# Altium PCB CH569W-R0.PcbDoc (part 1 of 4)
Units mil, origin at the board's own origin, x right, y up, seen from the top; angles counter-clockwise.
Board outline 3674 x 3156.46 mil, 4 copper layers (Top Layer, Mid-Layer 1, Mid-Layer 2, Bottom Layer); 78 components, 99 nets, 392 pads, 683 vias.
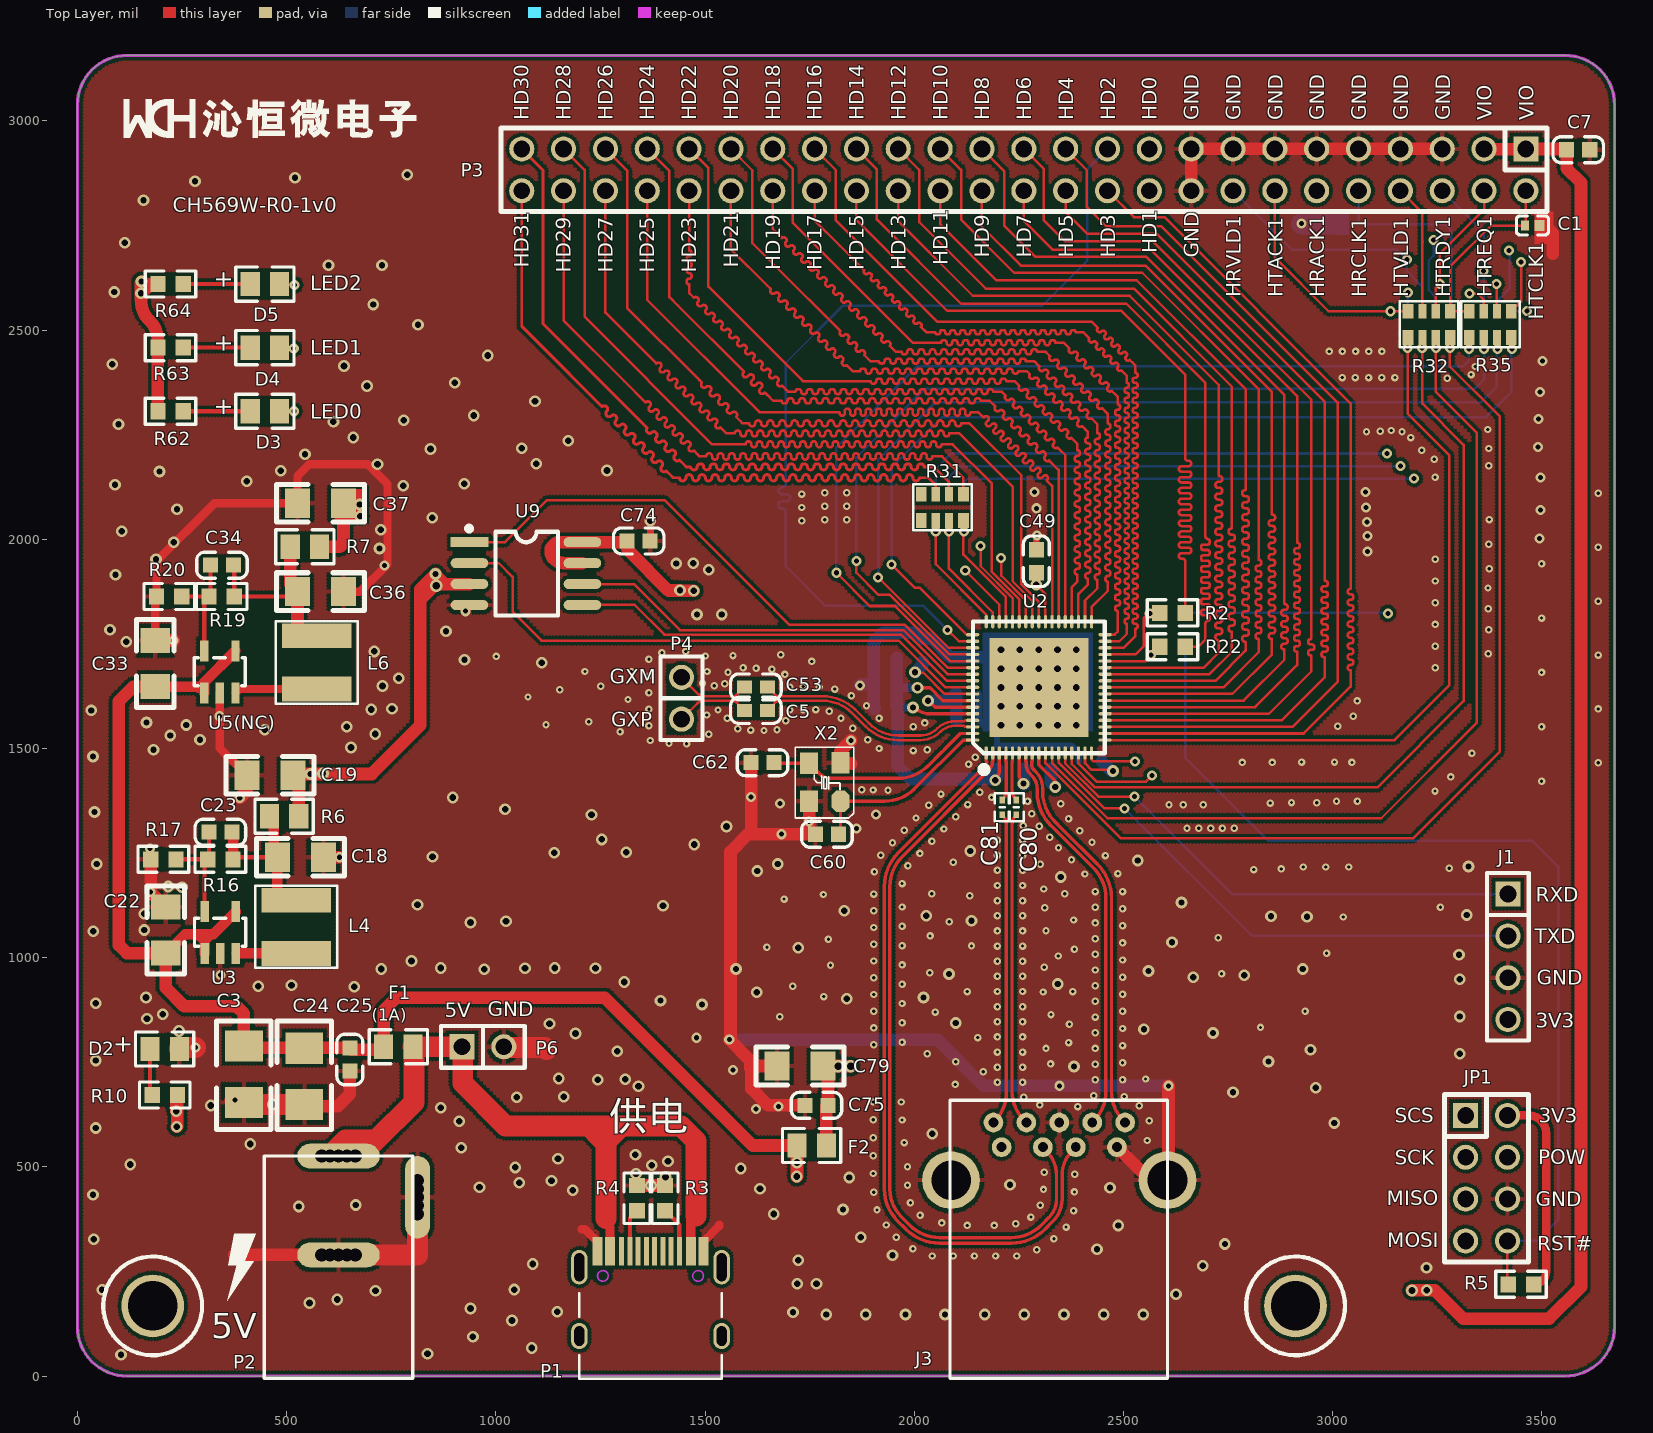
[diagram p0: Top Layer view]
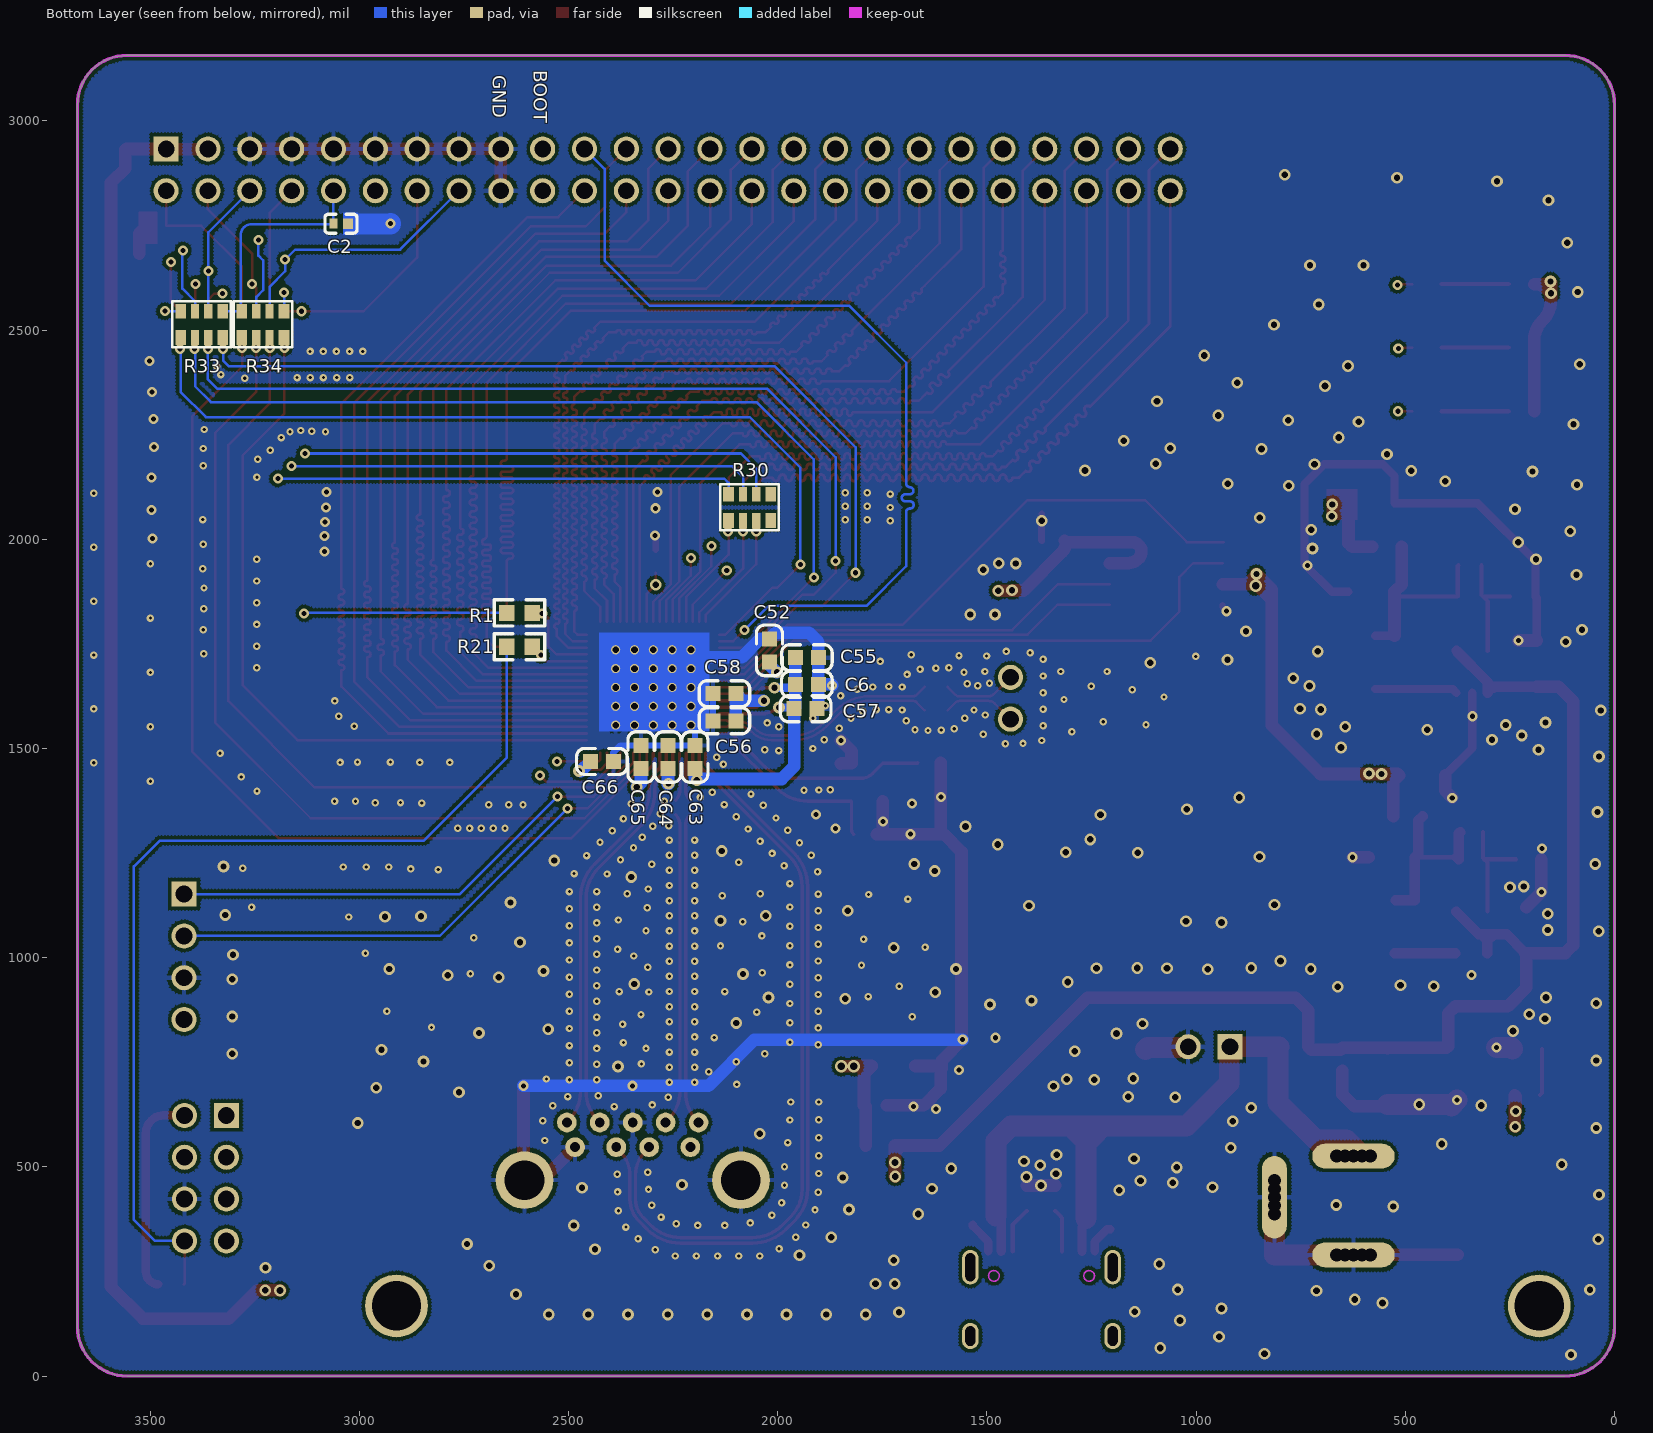
[diagram p1: Bottom Layer view, seen from below]
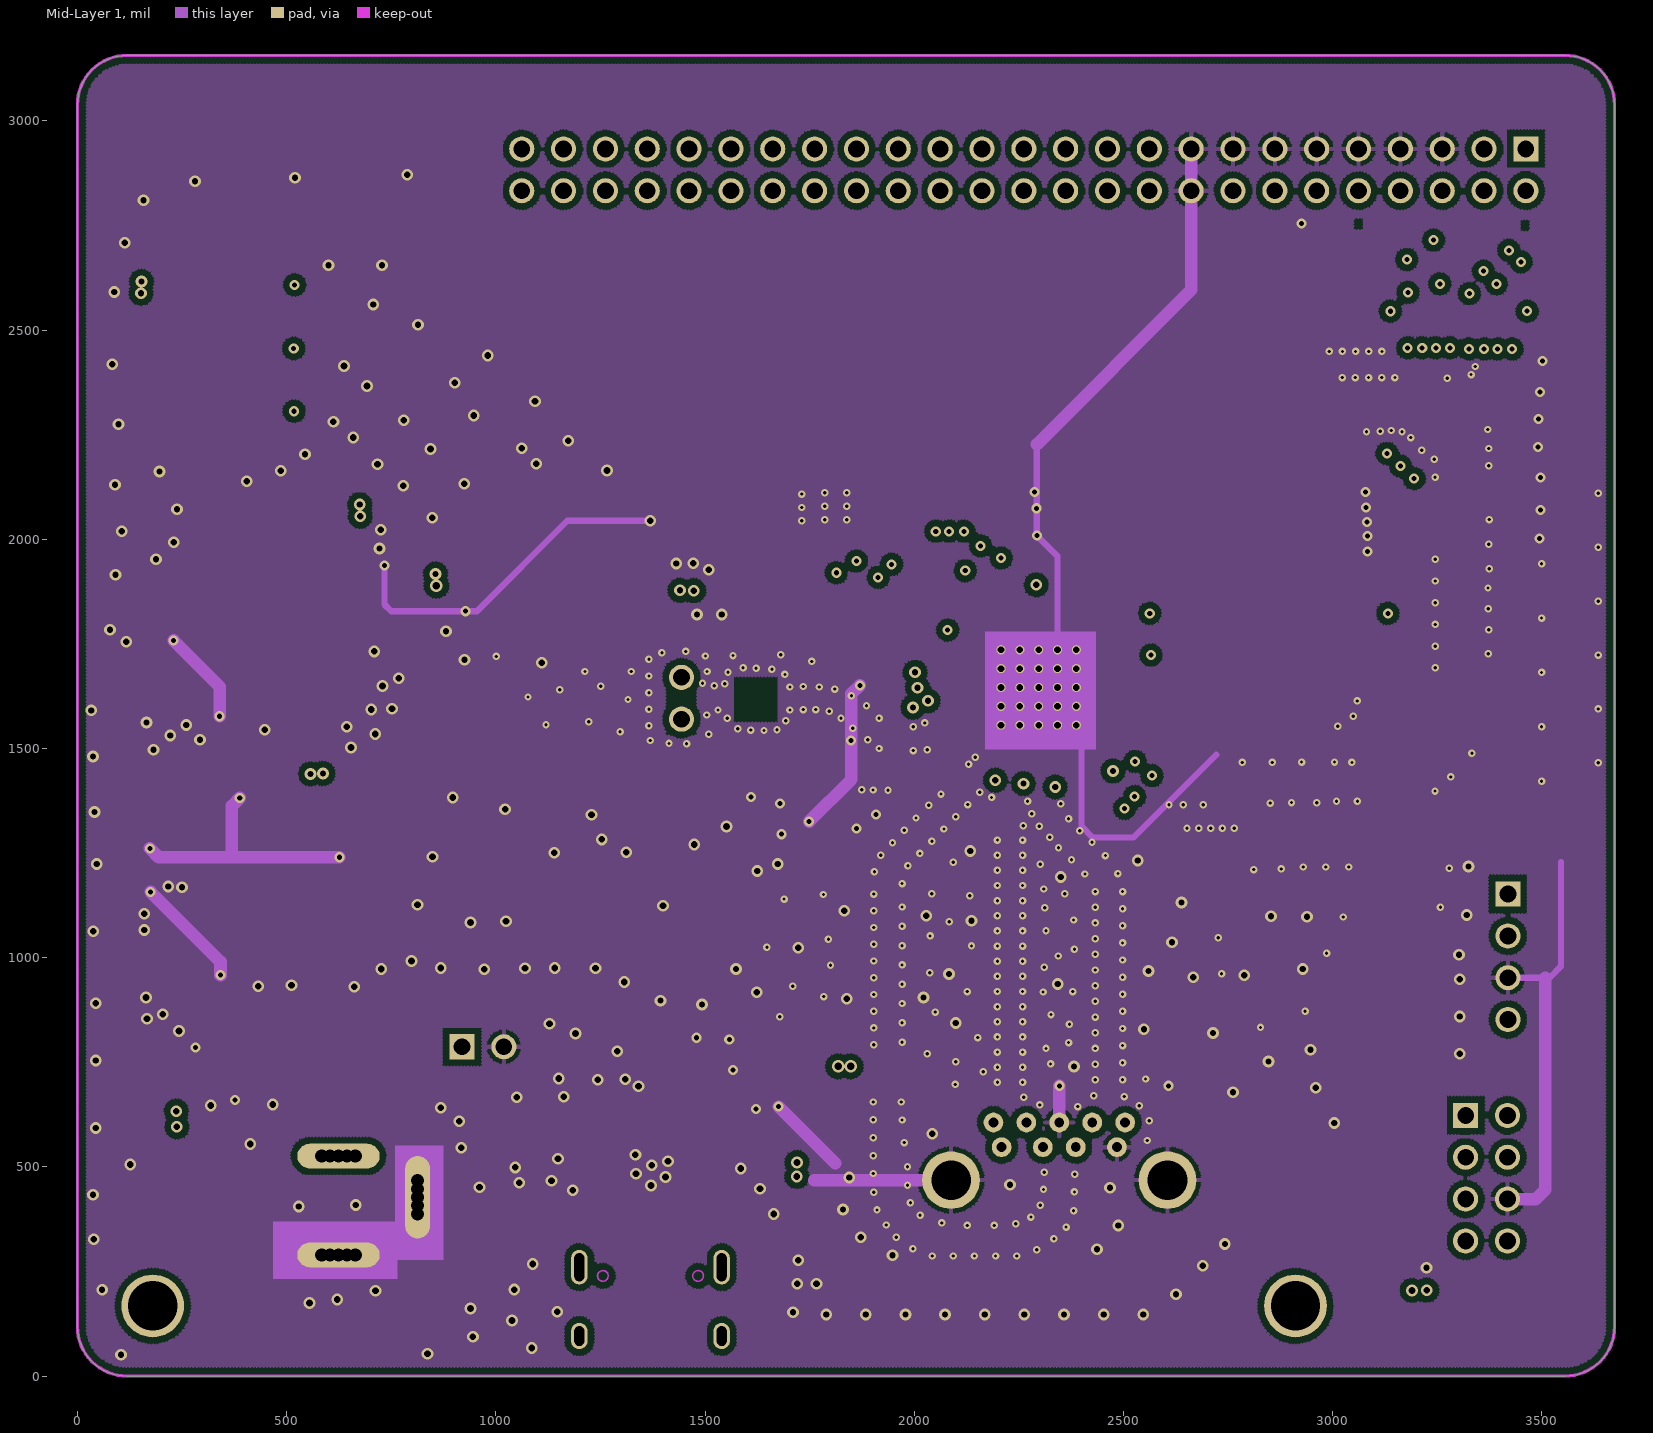
[diagram p2: Mid-Layer 1]
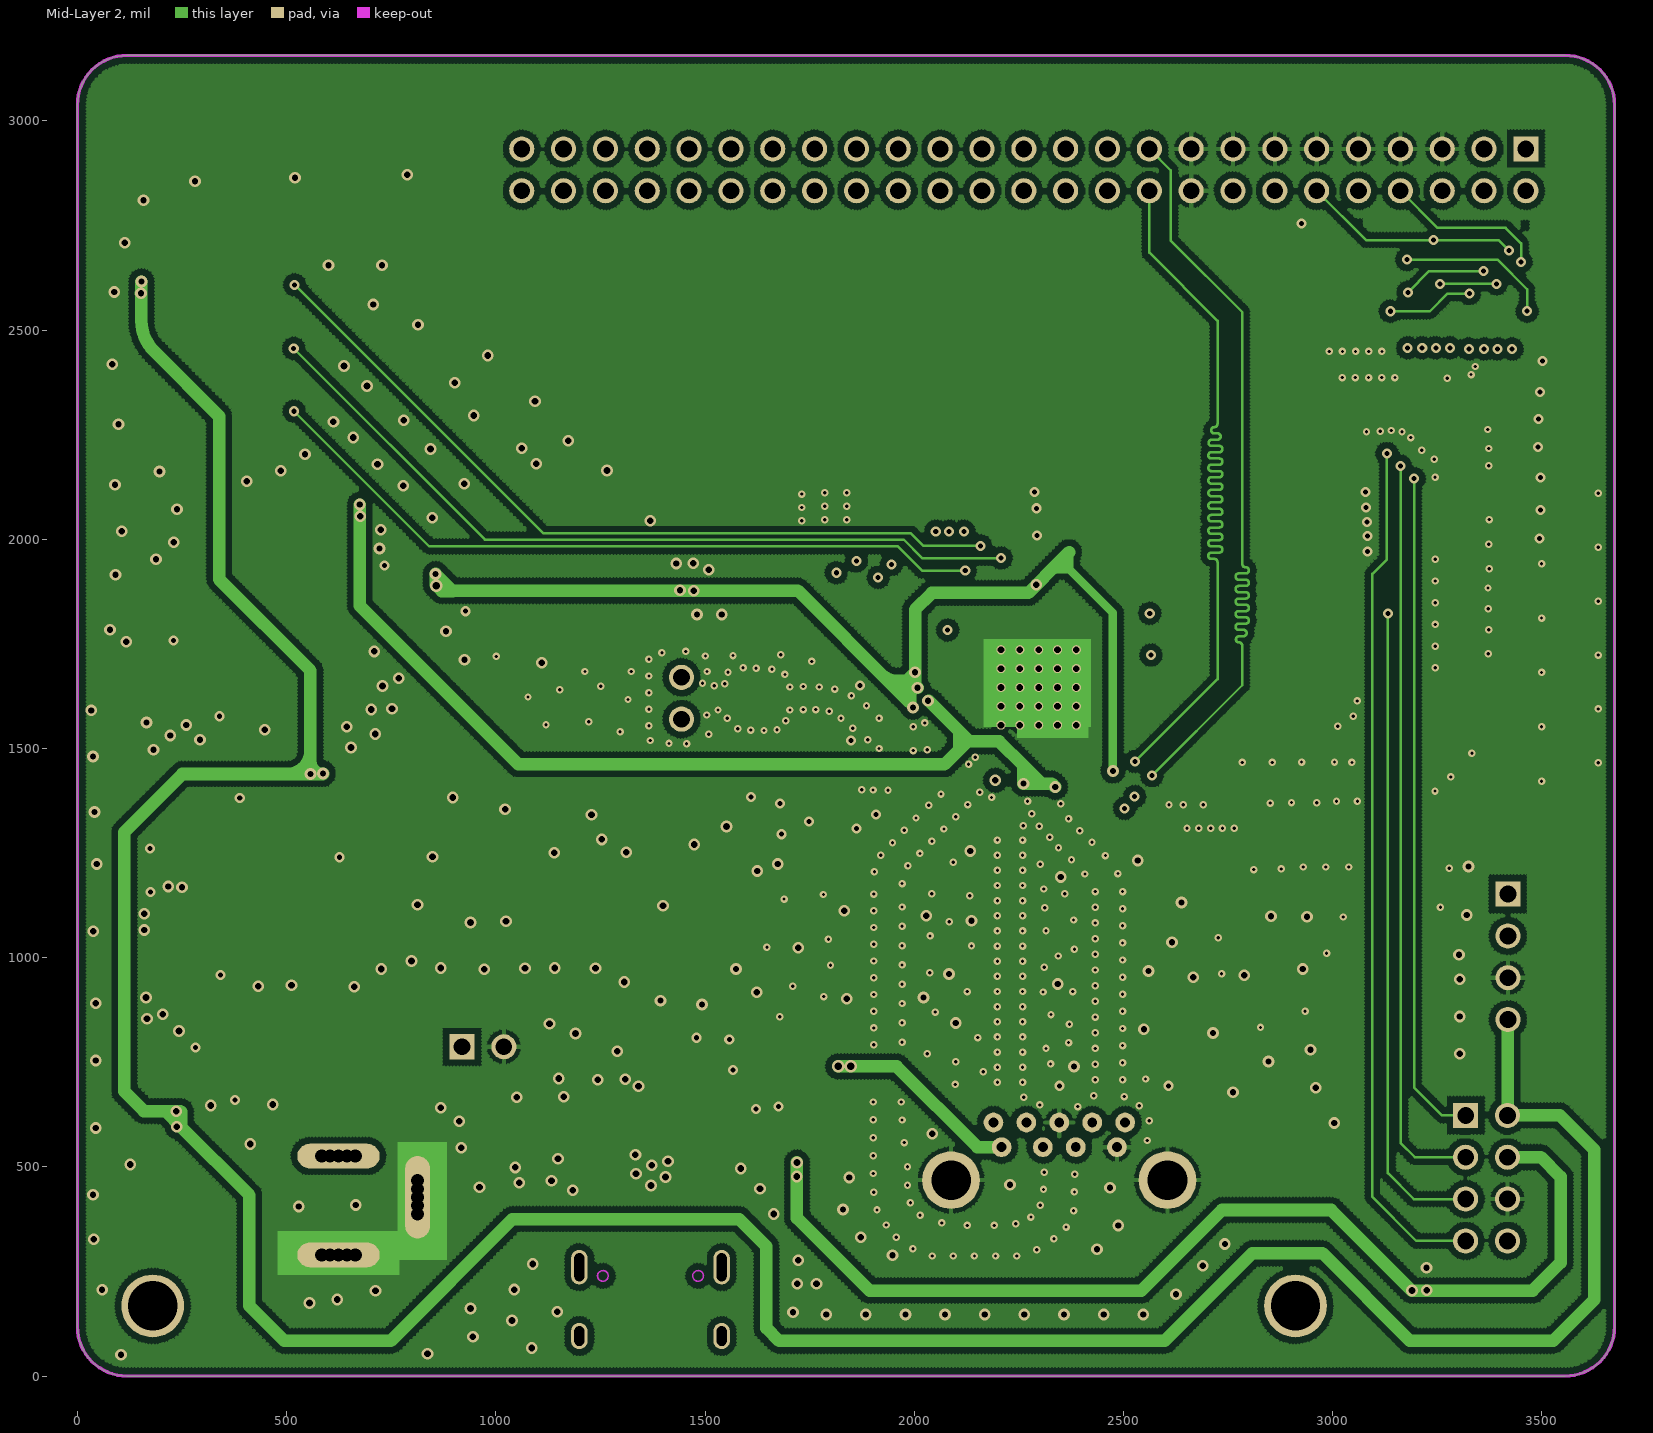
[diagram p3: Mid-Layer 2]

## Layer stack, top to bottom
Top Solder: solder mask 0.4, Solder Resist, Dk 3.5
Top Layer: signal copper 1.4
Dielectric1: core 12.6, FR-4, Dk 4.8
Mid-Layer 1: signal copper 1.4
Dielectric2: prepreg 12.6, FR-4, Dk 4.8
Mid-Layer 2: signal copper 1.4
Dielectric3: core 12.6, FR-4, Dk 4.8
Bottom Layer: signal copper 1.4
Bottom Solder: solder mask 0.4, Solder Resist, Dk 3.5

## Board outline
0,118.11 ccw(c118.11,118.11) 118.11,0 3555.89,0 ccw(c3555.89,118.11) 3674,118.11 3674,3038.35 ccw(c3555.89,3038.35) 3555.89,3156.46 118.11,3156.46 ccw(c118.11,3038.35) 0,3038.35

## Design rules (kind name [scope] priority, off if disabled: settings)
Clearance Clearance_4 [OnLayer('Bottom Layer') and InPolygon] p1: gap=8 ignorepadtopadclearanceinfootprint=FALSE except(0: Arc-Hole Track-Hole SMDPad-Hole THPad-Hole Via-Hole Fill-Hole Poly-Hole Region-Hole Text-Hole)
Clearance Clearance_2 [OnLayer('Top Layer')and InPolygon] p2: gap=8 ignorepadtopadclearanceinfootprint=FALSE except(0: Arc-Hole Track-Hole SMDPad-Hole THPad-Hole Via-Hole Fill-Hole Poly-Hole Region-Hole Text-Hole)
Clearance Clearance_3 [InPolygon] p3: gap=15 ignorepadtopadclearanceinfootprint=FALSE except(0: Arc-Hole Track-Hole SMDPad-Hole THPad-Hole Via-Hole Fill-Hole Poly-Hole Region-Hole Text-Hole)
Clearance Clearance_1 [IsVia] p4: gap=5 ignorepadtopadclearanceinfootprint=FALSE except(0: Arc-Hole Track-Hole SMDPad-Hole THPad-Hole Via-Hole Fill-Hole Poly-Hole Region-Hole Text-Hole)
Clearance [All] p5: gap=3.5 ignorepadtopadclearanceinfootprint=FALSE except(0: Arc-Hole Track-Hole SMDPad-Hole THPad-Hole Via-Hole Fill-Hole Poly-Hole Region-Hole Text-Hole)
ComponentClearance [All] p1 off: gap=10 collisioncheckmode=3 verticalgap=10 showdistances=FALSE
DiffPairsRouting [All] p1: maxlimit=5 minlimit=5 mostfreqgap=5 toplayer_minwidth=15 toplayer_maxwidth=15 toplayer_prefwidth=15 midlayer1_minwidth=15 midlayer1_maxwidth=15 midlayer1_prefwidth=15 midlayer2_minwidth=15 midlayer2_maxwidth=15 midlayer2_prefwidth=15 bottomlayer_minwidth=15 bottomlayer_maxwidth=15 bottomlayer_prefwidth=15 maxuncoupledlength=500
MinimumSolderMaskSliver [All] p1 off: minsoldermaskwidth=10
PolygonConnect PolygonConnect_1 [IsVia] p1: connectstyle=Direct reliefconductorwidth=10 reliefentries=4 polygonreliefangle="90 Angle" airgapwidth=10
PolygonConnect [All] p2: connectstyle=Relief reliefconductorwidth=10 reliefentries=4 polygonreliefangle="90 Angle" airgapwidth=10
RoutingVias [All] p1: holewidth=28 width=50 viastyle="Through Hole" minholewidth=7.87 minwidth=17.72 maxholewidth=28 maxwidth=50
SilkToSilkClearance [All] p1 off: silktosilkclearance=10
SilkToSolderMaskClearance SilkscreenOverComponentPads [IsPad] p1 off: minsilkscreentomaskgap=10 clearancetoexposedcopper=TRUE
SolderMaskExpansion [All] p1: expansion=4 istentingtop=FALSE
Width [All] p1: maxlimit=80 minlimit=3.5 preferedwidth=10
25 further rules are at their usual default settings.

## Classes and differential pairs
differential pair SSRX: +SSRX_P -SSRX_N
differential pair SSTX: +SSTX_P -SSTX_N
differential pair UD: +UD_P -UD_N

## Components (designator, comment, footprint, x,y, rotation, side; value= is the part's Value field where it differs from the comment)
C1 "NC(20pF)" 0402C 3494.64,2750.08 r270 top
C2 "NC(20pF)" 0402C 3027.36,2754.38 r270 bottom
C3 "NC(33uF)" 3528 397.96,653.89 r270 top
C5 "100nF" 0603C#1 1649,1591 r180 top
C6 "100nF" 0603C#2 1957.98,1653 r180 bottom
C7 "100nF" 0603C#2 3559.59,2930.96 r0 top
C18 "10uF" 3216 588,1240 r0 top
C19 "100nF" 3216 405,1436 r180 top
C22 "10uF" 3216 211,1121 r90 top
C23 "20pF" 0603C#2 314.19,1300 r0 top
C24 "33uF" 3528 542.48,783.89 r90 top
C25 "100nF" 0603C#2 651.11,729.18 r90 top
C33 "NC(10uF)" 3216 186,1758 r90 top
C34 "NC(20pF)" 0603C#2 318,1938 r0 top
C36 "NC(10uF)" 3216 636,1875 r0 top
C37 "NC(100nF)" 3216 526,2086 r180 top
C49 "100nF" 0603C#2 2292,1920 r90 top
C52 "100nF" 0603C#2 2020,1762 r270 bottom
C53 "100nF" 0603C#1 1649,1647.08 r180 top
C55 "3.3uF" 0603C#2 1903,1717 r0 bottom
C56 "100nF" 0603C#2 2155,1566 r180 bottom
C57 "100nF" 0603C#2 1906,1595 r0 bottom
C58 "3.3uF" 0603C#2 2155,1631 r180 bottom
C60 "20pF" 0603C#2 1764,1295 r0 top
C62 "20pF" 0603C#2 1665,1466 r180 top
C63 "100nF" 0603C#2 2198,1507 r270 bottom
C64 "100nF" 0603C#2 2262.5,1507 r270 bottom
C65 "100nF" 0603C#2 2327,1507 r270 bottom
C66 "100nF" 0603C#2 2393,1469 r0 bottom
C74 "100nF" 0603C#2 1369,1996 r180 top
C75 "100nF" 0603C#2 1794,647 r180 top
C79 "10uF" 3216 1782,741 r0 top
C80 "100nF" "C 0402_L" 2243.9,1359.03 r270 top
C81 "100nF" "C 0402_L" 2210.4,1359.03 r270 top
D2 "LED1" 0805+ 173.47,781.57 r0 top
D3 "翠绿" 0805+ 413,2306 r0 top
D4 "蓝灯" 0805+ 413,2458 r0 top
D5 "黄灯" 0805+ 413,2610 r0 top
F1 "1A" 0805 802.05,786.97 r180 top
F2 "1A" 0805 1790,551 r180 top
J1 "CON4" SIP4-2.54mm 3419,1152 r0 top
J3 "USB-AF3.0" USB3.0-Receptacle 2209,547 r0 top
JP1 "HEADER 4X2" IDC8-2.54mm 3318,623 r0 top
L4 "3.3uH" SMD_5x5mm 523,1010 r90 top
L6 "NC(3.3uH)" SMD_5x5mm 572,1642 r90 top
P1 "TYPE-C-Receptacle-2.0" TYPE-C-Receptacle-2.0 1369.68,-6.74 r0 top
P2 "POWER_JACK" DC-005 624,525.76 r90 top
P3 "LEFT_P" IDC50-2.54mm 3462,2933 r180 top
P4 "HEADER 2" SIP2-2.54mm#1 1444,1670 r0 top
P6 "Header 2" SIP2-2.54mm#2 919.2,786.97 r90 top
R1 "0Ω" 0603 2587,1824 r0 bottom
R2 "0Ω" 0603 2587,1824 r0 top
R3 "NC(5.1K)" 0603 1404.55,394.77 r90 top
R4 "NC(5.1K)" 0603 1337.34,394.77 r90 top
R5 "10K" 0603 3419.95,219.14 r0 top
R6 "0Ω" 0805 459,1338 r0 top
R7 "NC(0Ω)" 0805 508.58,1982 r0 top
R10 "1K" 0603 178.47,671.57 r0 top
R16 "10K" 0603 372,1235 r180 top
R17 "2.2K" 0603 175,1235 r0 top
R19 "NC(10K)" 0603 375,1863 r180 top
R20 "NC(10K)" 0603 189,1863 r0 top
R21 "0Ω" 0603 2587,1743 r0 bottom
R22 "0Ω" 0603 2587,1743 r0 top
R30 "0Ω" RCA-8P4R-0603 2067.25,2076 r180 bottom
R31 "0Ω" RCA-8P4R-0603 2067.25,2076 r180 top
R32 "0Ω" RCA-8P4R-0603 3230.61,2513.5 r180 top
R33 "0Ω" RCA-8P4R-0603 3376.94,2513.5 r0 bottom
R34 "0Ω" RCA-8P4R-0603 3230.61,2513.5 r180 bottom
R35 "0Ω" RCA-8P4R-0603 3376.94,2513.5 r0 top
R62 "1K" 0603 253,2306 r180 top
R63 "1K" 0603 253,2458 r180 top
R64 "1K" 0603 253,2610 r180 top
U2 "CH569W" QFN68_8X8 2298,1646 r0 top locked
U3 "8502AM" SOT753 304,1010 r0 top
U5(NC) "8502AM" SOT753 303,1633 r0 top
U9 "W25Q32JV" SOIC-8_208mil 937,1993 r0 top
X2 "30MHz" 3225 1749,1374 r90 top

## Footprints (in the part's own frame and the unit in brackets; to place one, negate y for a bottom-side part, rotate by r counter-clockwise, add the part's x,y. Pads: shape width x height; smd on the part's side, far side on the other; paste and mask are expansions set on the pad)
0402C [mm]
  rect 0.65x0.6 smd mask+0.051: 1(0,0)
  rect 0.618x0.508 smd mask+0.051: 2(0,-0.88)
  silkscreen extent -0.58,-1.4 0.57,0.55
0603 [mm]
  rect 0.93x0.98 smd: 1(0,0) 2(1.54,0)
  silkscreen extent -0.76,-0.79 2.3,0.79
0603C#1 [mil]
  rect 36x31.08 smd: 1(0,0) 2(55,0)
  silkscreen extent -33,-31 88,31
0603C#2 [mil]
  rect 36x36 smd: 1(0,0) 2(55,0)
  silkscreen extent -33,-31 88,31
0805 [mm]
  rect 1.16x1.47 smd: 1(0,0) 2(1.78,0)
  silkscreen extent -0.88,-1.04 2.66,1.03
0805+ [mm]
  rect 1.16x1.47 smd: 1(0,0) 2(1.78,0)
  silkscreen extent -0.88,-1.04 2.66,1.03
3216 [mil]
  rect 60x70 smd: 1(0,0) 2(-110,0)
  silkscreen extent -160,-45 50,45
3225 [mm]
  oct 1.3x1.1 smd: 1(0,-1.9)
  rect 1.3x1.1 smd: 2(2.337,-1.9) 3(2.3,0) 4(0,0)
  silkscreen extent -1.02,-2.7 3.27,0.84
3528 [mil]
  rect 75x90 smd: 1(0,0) 2(-135,0)
  silkscreen extent -195,-65 65,65
"C 0402_L" [mm]
  rect 0.4x0.343 smd: 1(-0.45,0) 2(0.45,0)
  silkscreen extent -0.85,-0.45 0.85,0.45, body extent -0.5,-0.26 0.5,0.26, height 0.53
DC-005 [mm]
  round 1 hole 0.8: 1(0,1.016) 1(0,0.508) 1(0,-0.508) 1(0,-1.016) 2(-6,-1.016) 2(-6,-0.508) 2(-6,0.508) 2(-6,1.016) 3(-3.516,-4.8) 3(-3.008,-4.8) 3(-1.992,-4.8) 3(-1.484,-4.8)
  oval 1.5x5 hole 0.8: 1(0,0) 2(-6,0)
  oval 5x1.5 hole 0.8: 3(-2.5,-4.8)
  silkscreen extent -13.5,-4.5 0,4.5
IDC8-2.54mm [mil]
  rect 60x60 hole 40: 1(0,0)
  round 60 hole 40: 2(100,0) 3(0,-100) 4(100,-100) 5(0,-200) 6(100,-200) 7(0,-300) 8(100,-300)
  silkscreen extent -50,-350 150,50
IDC50-2.54mm [mil]
  rect 60x60 hole 40: 1(0,0)
  round 60 hole 40: 2(0,100) 3(100,0) 4(100,100) 5(200,0) 6(200,100) 7(300,0) 8(300,100) 9(400,0) 10(400,100) 11(500,0) 12(500,100) 13(600,0) 14(600,100) 15(700,0) 16(700,100) 17(800,0) 18(800,100) 19(900,0) 20(900,100) 21(1000,0) 22(1000,100) 23(1100,0) 24(1100,100) 25(1200,0) 26(1200,100) 27(1300,0) 28(1300,100) 29(1400,0) 30(1400,100) 31(1500,0) 32(1500,100) 33(1600,0) 34(1600,100) 35(1700,0) 36(1700,100) 37(1800,0) 38(1800,100) 39(1900,0) 40(1900,100) 41(2000,0) 42(2000,100) 43(2100,0) 44(2100,100) 45(2200,0) 46(2200,100) 47(2300,0) 48(2300,100) 49(2400,0) 50(2400,100)
  silkscreen extent -50,-50 2450,150
QFN68_8X8 [mm]
  round 0.559 hole 0.406: 0(-2.299,-2.293) 0(-2.299,-1.149) 0(-2.299,-0.006) 0(-2.299,1.138) 0(-2.299,2.281) 0(-1.155,-2.293) 0(-1.155,-1.149) 0(-1.155,-0.006) 0(-1.155,1.138) 0(-1.155,2.281) 0(-0.012,-2.293) 0(-0.012,-1.149) 0(-0.012,-0.006) 0(-0.012,1.138) 0(-0.012,2.281) 0(1.132,-2.293) 0(1.132,-1.149) 0(1.132,-0.006) 0(1.132,1.138) 0(1.132,2.281) 0(2.275,-2.293) 0(2.275,-1.149) 0(2.275,-0.006) 0(2.275,1.138) 0(2.275,2.281)
  rect 6x6 smd: 0(0,0)
  oval 0.2x0.8 smd: 1(-3.2,-3.982) 2(-2.8,-3.982) 3(-2.4,-3.982) 4(-2,-3.982) 5(-1.6,-3.982) 6(-1.2,-3.982) 7(-0.8,-3.982) 8(-0.4,-3.982) 9(0,-3.982) 10(0.4,-3.982) 11(0.8,-3.982) 12(1.2,-3.982) 13(1.6,-3.982) 14(2,-3.982) 15(2.4,-3.982) 16(2.8,-3.982) 17(3.2,-3.982) 35(3.2,3.982) 36(2.8,3.982) 37(2.4,3.982) 38(2,3.982) 39(1.6,3.982) 40(1.2,3.982) 41(0.8,3.982) 42(0.4,3.982) 43(0,3.982) 44(-0.4,3.982) 45(-0.8,3.982) 46(-1.2,3.982) 47(-1.6,3.982) 48(-2,3.982) 49(-2.4,3.982) 50(-2.8,3.982) 51(-3.2,3.982)
  oval 0.8x0.2 smd: 18(4.018,-3.2) 19(4.018,-2.8) 20(4.018,-2.4) 21(4.018,-2) 22(4.018,-1.6) 23(4.018,-1.2) 24(4.018,-0.8) 25(4.018,-0.4) 26(4.018,0) 27(4.018,0.4) 28(4.018,0.8) 29(4.018,1.2) 30(4.018,1.6) 31(4.018,2) 32(4.018,2.4) 33(4.018,2.8) 34(4.018,3.2) 52(-4.018,3.2) 53(-4.018,2.8) 54(-4.018,2.4) 55(-4.018,2) 56(-4.018,1.6) 57(-4.018,1.2) 58(-4.018,0.8) 59(-4.018,0.4) 60(-4.018,0) 61(-4.018,-0.4) 62(-4.018,-0.8) 63(-4.018,-1.2) 64(-4.018,-1.6) 65(-4.018,-2) 66(-4.018,-2.4) 67(-4.018,-2.8) 68(-4.018,-3.2)
  silkscreen extent -4,-5.19 4,4
RCA-8P4R-0603 [mm]
  rect 0.65x0.9 smd: 1(-1.28,-0.8) 4(1.28,-0.8) 5(1.28,0.8) 8(-1.28,0.8)
  rect 0.5x0.9 smd: 2(-0.4,-0.8) 3(0.4,-0.8) 6(0.4,0.8) 7(-0.4,0.8)
  silkscreen extent -1.78,-1.4 1.78,1.4, body extent -1.6,-0.8 1.6,0.8, height 0.6
SIP2-2.54mm#1 [mil]
  round 60 hole 40: 1(0,0) 2(0,-100)
  silkscreen extent -50,-150 50,50
SIP2-2.54mm#2 [mil]
  rect 60x60 hole 40: 1(0,0)
  round 60 hole 40: 2(0,-100)
  silkscreen extent -50,-150 50,50
SIP4-2.54mm [mil]
  rect 60x60 hole 40: 1(0,0)
  round 60 hole 40: 2(0,-100) 3(0,-200) 4(0,-300)
  silkscreen extent -50,-350 50,50
SMD_5x5mm [mm]
  rect 1.5x4.2 smd: 1(0,0) 2(3.23,0)
  silkscreen extent -0.88,-2.5 4.12,2.5
SOIC-8_208mil [mil]
  rect 90x24 smd: 1(0,0)
  oval 90x24 smd: 2(0,-50) 3(0,-100) 4(0,-150) 5(270,-150) 6(270,-100) 7(270,-50) 8(270,0)
  silkscreen extent -7,-175 212,38
SOT753 [mil]
  rect 20x50 smd: 1(0,0) 2(37.4,0) 3(74.8,0) 4(74.8,100) 5(0,100)
  silkscreen extent -24,17 98,84
TYPE-C-Receptacle-2.0 [mm]
  oval 1x1.6 hole 0.6 slot 1.2 at 90 deg: 0(-4.32,2.6) 0(4.32,2.6)
  oval 1x2.1 hole 0.6 slot 1.7 at 90 deg: 0(-4.32,6.78) 0(4.32,6.78)
  rect 0.6x1.75 smd: A1(-3.225,7.75) A4(-2.45,7.75) B1(3.225,7.75) B4(2.45,7.75)
  rect 0.3x1.75 smd: A5(-1.25,7.75) A6(-0.25,7.75) A7(0.25,7.75) A8(1.25,7.75) B5(1.75,7.75) B6(0.75,7.75) B7(-0.75,7.75) B8(-1.75,7.75)
  Keep-Out Layer circle w0.1: c-2.89,6.25 r0.325
  Keep-Out Layer circle w0.1: c2.89,6.25 r0.325
  silkscreen extent -4.32,0 4.32,5.2
USB3.0-Receptacle [mm]
  round 3.5 hole 2.4: 0(-3.07,-2) 0(10.07,-2)
  round 1.2 hole 0.6: 1(0,0) 2(2.5,0) 3(4.5,0) 4(7,0) 5(7.5,1.5) 6(5.5,1.5) 7(3.5,1.5) 8(1.5,1.5) 9(-0.5,1.5)
  silkscreen extent -3.14,-14.04 10.07,2.85

## Part data
C1 C2 C3 C5 C6 C7 C18 C19 C22 C23 C24 C25 C33 C34 C36 C37 C49 C52 C53 C55 C56 C57 C58 C60 C62 C63 C64 C65 C66 C74 C75 C79 C80 C81: library part CAP, "Capacitor"
D2: "Typical RED GaAs LED", LatestRevisionDate=08-Jul-2005, LatestRevisionNote="Mech Layer 1 removed.", PackageDescription="LED; 2 Leads", PackageReference=LED-1, Published=8-Jun-2000, Publisher="Altium Limited"
D3: library part "0805 翠绿", "发光二极管", Package=0805, SuppliersPartNumber=C2297, ComponentLink1Description=供应商链接, ComponentLink1URL=http://www.szlcsc.com/product/details_2670.html, Supplier=LC
D4: library part "0805 蓝灯", "发光二极管", Package=0805, SuppliersPartNumber=C2293, ComponentLink1Description=供应商链接, ComponentLink1URL=http://www.szlcsc.com/product/details_2666.html, Supplier=LC
D5: library part "0805 黄灯", "发光二极管", Package=0805, SuppliersPartNumber=C2296, ComponentLink1Description=供应商链接, ComponentLink1URL=http://www.szlcsc.com/product/details_2669.html, Supplier=LC
F1 F2: library part FUSE1, "Fuse"
J1: "Connector"
J3: library part USB-AF3.0-90卷
L4 L6: library part INDUCTOR
P1: "Type-C USB2.0 母座"
P3: library part "HEADER 25X2"
P4 P6: "Header, 2-Pin"
  P6: LatestRevisionDate=17-Jul-2002, LatestRevisionNote="Re-released for DXP Platform.", Publisher="Altium Limited"
R1 R2 R3 R4 R5 R10 R16 R17 R19 R20 R21 R22 R62 R63 R64: library part R
R6 R7: library part RES
R30 R31 R32 R33 R34 R35: library part R-8P4R, "贴片网络排阻", BOM名称=贴片网络排阻, 学习资源=www.ooocke.com, 版权归属=源创客
U2: "32bit RISC-V MCU with USB 3.0 SS/HS & quad UART & AES & ETH & PIF"
X2: library part 晶体

## Free pads (board coordinates)
  round 150 hole 118.11: 0(179.91,167.63) 0(2911.43,167.63)

## Via types
v1: diameter 17.72, hole 7.87, Top Layer to Bottom Layer, tented both sides, 350 vias
v2: diameter 28, hole 15, Top Layer to Bottom Layer, tented both sides, 138 vias
v3: diameter 28, hole 16, Top Layer to Bottom Layer, 104 vias
v4: diameter 24, hole 12, Top Layer to Bottom Layer, tented both sides, 60 vias
v5: diameter 24, hole 12, Top Layer to Bottom Layer, 25 vias
v6: diameter 28, hole 15, Top Layer to Bottom Layer, 3 vias
v7: diameter 30, hole 18, Top Layer to Bottom Layer, tented both sides, 3 vias

## Nets (pads, with @x,y where several pads share a name; then routed paths per layer and width w, separated by ;. In a path a pad name is that pad's centre, name@x,y a point inside that pad or via, vN(x,y) a via of type N, cw(c..) or ccw(c..) an arc to the next point about the centre after c; other vN are vias at no path point)
1V2: C37.2 C56.2 C58.2 C64.2 C65.2 R7.2 U2.6 U2.9 U2.63 | length 3161.5
  Top Layer w8.22: v2@2035,1614 2050.24,1598.76 U2.63@2139.82,1598.76 ; U2.6@2250.76,1489.22 2250.76,1440.73 ccw(c2285.73,1440.73) v2(2261,1416) ; U2.9@2298,1489.22 2298,1461 2334.22,1424.78 cw(c2315.44,1406) v2@2342,1406
  Top Layer w30: R7.2@578.66,1982 627,1982 636,1991 C37.2@636,2086 672,2086 v2(675,2083)
  Mid-Layer 2 w30: v2(675,2083) 675,1841 1054,1462 2072,1462 2108,1498 ; v2@2035,1614 2108,1541 ; v2(2337,1408) 2329,1416 2304,1416 ; 2108,1498 2127,1517 ; 2108,1498 2108,1517 ; 2108,1517 2127,1517 ; 2108,1517 2108,1541 ; 2108,1541 2132,1517 ; 2127,1517 2132,1517 ; 2132,1517 2203,1517 2261,1459 ; 2261,1442 2287,1416 ; 2261,1442 2261,1459 ; 2261,1442 v2(2261,1416) 2287,1416 ; 2261,1459 2304,1416 ; 2287,1416 2304,1416
  Bottom Layer w30: v2@2035,1614 2083,1614 C58.2@2100,1631 C56.2@2100,1566 ; C64.2@2262.5,1452 v2@2262.5,1417.5 ; C65.2@2327,1452 2327,1418 v2(2337,1408) ; v2@2262.5,1417.5 2262.5,1414.5 v2(2261,1416) v2@2262.5,1417.5
  other v2: 2033,1614 676,2055
3V3: C6.1 C19.2 C49.1 C52.2 C55.2 C57.2 C63.2 C66.2 C74.2 J1.4 JP1.2 R5.2 R6.2 R10.2 R62.2 R63.2 R64.2 U2.3 U2.16 U2.42 U2.61 U2.62 U2.64 U9.3 U9.7 U9.8 | length 14826.8
  Top Layer w6: v2@2006,1681 2022,1681 2072.75,1630.25 U2.61@2139.82,1630.25 ; C49.1@2292,1920 v2(2292,1891) 2313.75,1869.25 U2.42@2313.75,1802.78 ; U2.16@2408.24,1489.22 2408.24,1464.76 2424,1449 v2@2473,1449
  Top Layer w8.22: v2@2001,1598 ccw(c2037.2,1634.2) 2037.2,1583.01 U2.64@2139.82,1583.01 ; v2(2008,1645) 2038,1645 2068.5,1614.5 U2.62@2139.82,1614.5 ; v2@2196,1429 ccw(c2177.87,1447.13) 2203.51,1447.13 U2.3@2203.51,1489.22
  Top Layer w20: JP1.2@3418,623 3468.13,623 cw(c3468.13,580.64) 3510.5,580.64 3510.5,249.06 cw(c3480.58,249.06) R5.2@3480.58,219.14
  Top Layer w30: R62.2@192.37,2306 R63.2@192.37,2458 192.37,2474.42 ccw(c124.71,2474.42) 172.55,2522.26 cw(c222.17,2571.88) 152,2571.88 v2(152,2588) ; v3(236.26,633.14) 236.26,668.74 R10.2@239.1,671.57 239.1,597.17 v3(237.59,595.67) ; R6.2@529.08,1338 529.08,1421.92 C19.2@515,1436 518,1439 v2(557,1439) 703,1439 819,1555 819,1880 v2(856,1917) 856,1915 879,1892 v7@861,1892 ; 819,1855 v7@853,1889 ; 879,1893 U9.3@937,1893 ; U9.7@1207,1943 1162.91,1943 cw(c1162.91,1978.25) 1137.99,1953.32 cw(c1154.13,1969.47) 1131.3,1969.47 1131.3,1974.54 cw(c1142.53,1974.54) 1134.59,1982.48 1141.19,1989.08 cw(c1150.66,1979.61) 1150.66,1993 U9.8@1207,1993 C74.2@1311,1993 ; C74.2@1314,1996 C74.2@1311,1993 ; v2(1440,1878) 1412,1878 ; v2(1473,1877) 1413,1877 1412,1878 ; v2(152,2588) 161.01,2597.01 cw(c192.37,2565.65) R64.2@192.37,2610 167.49,2610 cw(c167.49,2630.49) v2(153,2616) ccw(c155.41,2613.59) 152,2613.59 v2(152,2588) ; v7@853,1889 856,1892 v7@861,1892 ; v7@853,1889 v7(858,1889) v7@861,1892 ; C74.2@1311,1993 ccw(c1344.8,1993) 1320.9,1969.1 1412,1878
  Mid-Layer 2 w20: 1954,1645 v2(2008,1645) 1996,1633 ; v2@2001,1598 v2@1996,1603 ; 2331,1930 2332.5,1928.5 2370.5,1928.5 ; 2350,1949 2370.5,1928.5 ; 2372,1971 2370.5,1969.5 2370.5,1928.5 ; v2(2475,1446) 2475,1824 2370.5,1928.5 ; v2@1996,1603 1989,1610 1989,1626 1996,1633 ; v2@1996,1603 1996,1633
  Mid-Layer 2 w30: v2(152,2588) v2@153,2589 ; v2(153,2616) v2@153,2589 ; v3@246.26,596.99 410.83,432.42 410.83,167.81 494.65,84 748.88,84 1039.91,375.03 1581.71,375.03 1646.63,310.1 1646.63,114.62 1677.25,84 2598.65,84 2808.19,293.54 2975.36,293.54 3184.9,84 3527,84 3625,182 3625,541 3543,623 JP1.2@3418,623 3419,624 J1.4@3419,852 ; v2(587,1440) v2@586,1439 ; 897,1877 v2(1473,1877) 1722,1877 1954,1645 1989,1610 ; 1922.61,1676.39 ccw(c1957.74,1711.52) 1957.74,1661.84 1980.56,1661.84 ccw(c1980.56,1664.91) 1982.74,1662.74 v2(2002,1682) ; v2(2008,1645) cw(c2022.49,1659.49) 2002,1659.49 v2(2002,1682) ; 2370.5,1969.5 2350,1949 2331,1930 v2(2292,1891) 2273,1872 2042,1872 2002,1832 v2(2002,1682) ; v2@153,2589 153,2521.42 ccw(c253,2521.42) 182.29,2450.71 339,2294 339,1904 557,1686 557,1494.05 ; 210.11,633.14 v3(236.26,633.14) 246.26,633.14 247.59,631.82 247.59,595.67 210.11,633.14 ; 210.11,633.14 159.14,633.14 112,680.28 112,1300 251,1439 501.95,1439 ; 501.95,1439 ccw(c501.95,1494.05) 557,1494.05 ; 501.95,1439 v2(557,1439) ; v2(557,1439) 557,1468 ; v2(557,1439) v2@586,1439 ; 557,1468 ccw(c586,1468) v2@586,1439 ; 557,1468 557,1494.05 ; v7@856,1891 v7(858,1889) 871,1876 897,1876 v2(856,1917) v7@856,1891
  Bottom Layer w20: C6.1@1957.98,1653 1965.98,1645 v2(2008,1645) ; C57.2@1961,1595 1964,1598 v2@2001,1598 ; v2@2471,1446 v2(2475,1446)
  Bottom Layer w30: C55.2@1958,1717 C6.1@1957.98,1653 1958,1598 C57.2@1961,1595 1961,1457 1991,1427 2195,1427 2198,1430 C63.2@2198,1452 ; v2(2002,1682) 2020,1700 C52.2@2020,1707 ; C66.2@2448,1469 v2@2471,1446
  other v2: 2194,1424 1997,1598
3X1-IN: C60.2 U2.68 X2.1 | length 452.5
  Top Layer w8.22: C60.2@1819,1295 ccw(c1807.4,1306.6) 1823.8,1306.6 X2.1@1823.8,1374 1929.58,1374 ccw(c1929.58,1474) 2000.29,1403.29 2117.02,1520.02 U2.68@2139.82,1520.02
3X1-OUT: C62.1 U2.67 X2.3 | length 575.9
  Top Layer w8.22: C62.1@1665,1466 ccw(c1668.5,1469.5) 1668.5,1464.55 X2.3@1749,1464.55 1773.22,1440.33 ccw(c1801.4,1468.5) 1801.4,1428.66 1961.24,1428.66 ccw(c1961.24,1528.66) 2031.95,1457.95 ; 2065.53,1491.53 2031.95,1457.95 ; U2.67@2139.82,1535.76 2109.76,1535.76 2031.95,1457.95
GND: C1.1 C2.1 C3.1 C6.2 C7.2 C18.1 C19.1 C22.1 C24.2 C25.1 C33.1 C36.1 C37.1 C49.2 C52.1 C55.1 C56.1 C57.1 C58.1 C60.1 C62.2 C63.1 C64.1 C65.1 C66.1 C74.1 C75.2 C79.2 D2.2 J1.3 J3.0 J3.4 J3.7 JP1.6 P1.A1 P1.B1 P2.2 P2.3 P3.5 P3.7 P3.9 P3.11 P3.13 P3.15 P3.17 P3.18 P6.2 R3.2 R4.2 R17.1 R20.1 U2.0 U3.2 U5(NC).2 U9.4 X2.2 X2.4 | length 13780.5
  Top Layer w15: v4(928,1828) 937,1837 U9.4@937,1843 ; 1369,2061 C74.1@1369,1996 1370,1997 v2@1370,2035 ; C49.2@2292,1975 2292,2008 v4(2293,2009)
  Top Layer w20: C33.1@186,1758 186,1860 R20.1@189,1863 189,1948 327,2086 C37.1@526,2086 526,2151 554,2179 694,2179 741,2132 741,1940 676,1875 C36.1@636,1875 ; 340.4,1633 340.4,1577.4 v4(340,1577) 340,1501 C19.1@405,1436 ; 1204.76,350.8 1212.93,350.8 1242.71,321.02 P1.A1@1242.71,298.38 ; P1.B1@1496.65,298.38 1496.65,321.02 1533.81,358.17 1533.81,362.34
  Top Layer w30: R17.1@175,1235 v4(175,1157) C22.1@211,1121 ; C33.1@186,1758 v4(230,1758) ; 375.29,289.54 P2.2@604,289.54 ; v4(388,1382) 405,1399 C19.1@405,1436 ; C24.2@542.48,648.89 546.5,644.87 622.35,644.87 651.11,673.63 C25.1@651.11,729.18 ; C18.1@588,1240 v4(626,1240) ; P2.2@614,299.54 P2.2@624,289.54 P2.2@644,289.54 P2.2@664,289.54 ; 798.54,289.54 812.98,303.98 ; R4.2@1337.34,455.4 R3.2@1404.55,455.4 ; v4(1558,804) 1608.62,753.38 1608.62,735.77 ; v4@1561,804 1561,1253 1603,1295 1617,1295 ; C62.2@1610,1466 1610,1302 1617,1295 ; C79.2@1672,741 1614,741 1611,744 1611,687 1651,647 C75.2@1739,647 ; X2.4@1749,1374 v4(1749,1325) C60.1@1749,1295 ; C60.1@1764,1295 C60.1@1749,1295 ; v4(1849,1519) 1823.8,1493.8 1823.8,1464.55 1848.45,1464.55 1850,1463 ; J3.4@2484.59,547 2563.33,468.26 J3.0@2605.46,468.26 2607.8,470.6 v4(2607.8,693.8) ; P3.18@2662,2833 P3.17@2662,2933 P3.15@2762,2933 P3.13@2862,2933 P3.11@2962,2933 P3.9@3062,2933 P3.7@3162,2933 P3.5@3262,2933 ; C1.1@3501.4,2752.63 3504.87,2752.63 3525.98,2731.52 3525.98,2682.65 ; 1617,1295 C60.1@1749,1295
  Top Layer w50: D2.2@243.54,781.57 243.54,782.64 245.71,784.8 v5(282.28,784.8) ; v5(376.13,659.69) C3.1@390.18,645.64 ; C3.1@391.09,648.89 v3(466.78,648.89) C24.2@542.48,648.89 ; P2.2@664,289.54 798.54,289.54 812.98,289.54 812.98,303.98 P2.3@812.98,387.34 P2.3@812.98,407.34 P2.3@812.98,427.34 P2.3@812.98,447.34 ; P6.2@1019.2,786.97 1021.11,785.06 1116.4,785.06 1121.07,780.4
  Mid-Layer 1 w15: v4(734,1937) 734,1844 750,1828 v4(928,1828) 955,1828 1171,2044 v2(1369,2044) ; 2293,2227 v4(2293,2009) 2342.56,1959.44 U2.0@2342.56,1735.8 ; U2.0@2387.57,1555.74 2400,1543.31 2400,1314 2427,1287 2524,1287 2722,1485 ; J1.3@3419,952 3508,952 3519,952 3546,979 3546,1228
  Mid-Layer 1 w30: v4(173,1261) 194,1240 369,1240 ; v4(175,1157) 342,990 v4(342,958) ; v4(230,1758) 340,1648 v4(340,1577) ; v4(388,1382) 369,1363 369,1240 ; v4(626,1240) 369,1240 ; v4(1676,644) 1811.74,508.26 ; v4(1749,1325) 1850,1426 1850,1631 v4(1870,1651) ; 1761.74,468.26 J3.0@2088.13,468.26 ; 2293,2227 2662,2596 P3.18@2662,2833 P3.17@2662,2933 ; J3.7@2346.8,606.06 v4(2346.8,693.8) ; JP1.6@3418,423 3486,423 3508,445 3508,952
  Bottom Layer w15: C58.1@2155,1631 C56.1@2155,1566 2165.26,1555.74 U2.0@2207.51,1555.74 2198,1546.23 C63.1@2198,1507 C64.1@2262.5,1507 C65.1@2327,1507 2376,1507 2393,1490 C66.1@2393,1469
  Bottom Layer w30: v4(1558,804) 2056,804 2166.2,693.8 v4(2346.8,693.8) v4(2607.8,693.8) ; v4(1870,1651) 1872,1653 C6.2@1902.98,1653 ; C57.1@1906,1595 1903,1598 C55.1@1903,1717 1903,1754 1926,1777 2005,1777 C52.1@2020,1762 2042,1762 2086,1718 2189.7,1718 U2.0@2207.51,1735.8
  Bottom Layer w50: v5(2925.28,2755.05) ccw(c2926.95,2755.05) v5@2926.95,2753.38 ; v5@2933.95,2753.38 3013.36,2753.38
  other v1: 2043,287 2093.5,287 2144,287 2194.5,287 2245,287 2293,302 1997,304 2334,328 1957,332 2363,356 2127,360 2191,360 1933,361 2243,364 2066,366 2279,380 2014,384 2381,395 1911,397 2301,408 1991,414 1903,439 2383,440 2309,446 1984,456 2384,482 1902,484 2311,487 1984,500 1902,526.75 1976,558 2557,563 1902,569.5 2562,610 1902,612.25 1971,612 2391,644 2538,646 2300,648 1902,655 1969,655 2262,666 2502,668 2429,670 2098,697 2199,702 2259,702 2433,708 2498,708 2553,710 2165,727 2199,738.19 2259,738.19 2433,745.5 2326,746 2498,748.91 2099,751 2031,770 2199,774.38 2259,774.38 2315,783 2433,783 2498,789.82 1903,792 2369,797 1971,798.12 2152,809 2199,810.56 2259,810.56 2433,820.5 2498,830.73 1903,832 2827.75,833.28 2371,841 1971,844.25 2199,846.75 2259,846.75 2433,858 1679,859 2327,864 2050,870 1903,872 2498,871.64 2934.23,872.17 2199,882.94 2259,882.94 1971,890.37 2433,895.5 1784,907 1903,912 2498,912.54 2308,918 2127,919 2199,919.12 2259,919.12 2379,919 1710,932 2433,933 1971,936.5 1903,952 2498,953.45 2199,955.31 2259,955.31 2734.63,961.82 2037,964 2433,970.5 2311,977 1800,982 1971,982.62 1903,992 2199,991.5 2259,991.5 2498,994.36 2344,1004 2433,1008 2985.62,1010.79 2383,1020 1648,1025 2137,1028 2199,1027.69 2259,1027.69 1971,1028.75 1903,1032 2498,1035.27 1795,1044 2433,1045.5 2726.98,1047.52 2038,1052 2199,1063.88 2259,1063.88 2315,1064 1903,1072 1971,1074.87 2498,1076.18 2433,1083 2084,1086 2381,1090 3025.41,1097.26 2199,1100.06 2259,1100.06 1903,1112 2498,1117.09 2312,1119 2433,1120.5 3257.72,1120.26 1971,1121 2199,1136.25 2259,1136.25 1689,1140 2133,1148 1783,1151 1903,1152 2042,1153 2360,1153 2433,1158 2498,1158 2310,1164 2199,1172.44 2259,1172.44 1971,1177 2408,1200 2487,1201 1905,1205 2199,1208.62 2259,1208.62 2811.92,1210.51 2876.96,1212.04 3278.67,1213.92 2929.76,1216.63 2983.32,1216.63 3038.42,1216.63 1985,1220 2301,1223 2093,1228 2376,1234 2457,1244 1920,1245 2199,1244.81 2259,1244.81 2013.67,1249.17 2345,1263 1948.1,1274.6 2425,1276 2042.33,1278.33 2199,1281 2259,1281 2324,1288 2396,1303 1976.2,1304.2 2071,1307.5 2652,1309 2680.25,1309 2708.5,1309 2736.75,1309 2765,1309 2299,1314 2261,1315 2369,1332 2004.3,1333.8 2099.67,1336.67 2281,1344 2035,1364 2608.97,1365.17 2643.09,1365.17 2128.33,1365.83 2690.61,1365.6 2350,1368 2851.24,1369.54 2962.2,1370.11 2901.83,1370.69 2271,1374 3009.34,1373.56 3059.36,1374.13 2185,1383 2064,1391 2157,1395 3244.82,1398.11 1937.41,1400.42 1874.83,1401.02 1901.68,1400.82 3499.55,1421.96 3282.37,1431.9 2130,1462 3634.84,1465.62 2784.24,1466.59 2855.53,1466.59 3046.26,1466.59 2925.9,1467.52 3004.6,1467.52 2146,1479 3333.06,1488.22 1998,1495 2031,1497 1916,1500 1456,1511 1414,1512 1369,1519 1889,1521 1509,1534 1297,1540 1641,1543 1609,1544 1672,1545 1578,1547 1853,1548 1998,1552 3499.55,1551.86 3012.64,1552.93 1366,1554 1120,1557 2025,1561 1222,1564 1693,1566 1553,1572 1825,1572 1916,1572 3049.22,1576.97 1504,1580 1797,1589 1531,1592 1703,1592 1735,1593 1765,1593 1366,1593.75 3634.84,1594.43 1886,1602 3059.15,1613.56 1316,1617 1077,1623 1850,1626 1366,1633.5 1153,1640 1810,1642 1703,1647 1773,1647 1735,1648 1251,1649 1522,1650 1547,1655 1494,1656 1366,1673.25 1691,1677 1555,1682 3499.55,1681.76 1213,1684 1324,1684 1505,1684 1660,1689 1622,1692 1591,1693 3245.21,1692.8 1755,1708 1366,1713 1001,1720 1501,1721 1567,1722 3634.84,1723.24 1681,1724 3371.99,1726.63 1397,1729 1454,1732 3245.21,1744.65 3373.32,1783.61 3245.21,1796.5 3499.55,1811.66 3371.87,1834.28 3245.21,1848.34 3634.84,1852.05 3371.51,1883.5 3245.21,1900.19 3374.15,1929.21 3499.55,1941.56 3245.21,1952.04 3634.84,1980.85 3372.96,1988.15 1731,2044 1786,2047 1839,2047 3374.42,2047.1 1731,2076 1786,2079 1839,2079 1731,2108 3634.84,2109.66 1786,2111 1839,2111 3245,2148 3372.95,2175.94 3243,2191 3213,2213 3373.25,2216.91 3187,2243 3081,2257 3166,2257 3114,2258 3140,2260 3370.86,2262.38 3274,2385 3023,2386.5 3054.5,2386.5 3086,2386.5 3117.5,2386.5 3149,2386.5 3331.01,2393.7 3341,2413 2992,2449 3023.5,2449 3055,2449 3086.5,2449 3118,2449
  other v2: 104,51 1789.53,147 1884.29,147 1979.06,147 2073.82,147 2168.59,147 2263.35,147 2358.12,147 2452.88,147 2547.65,147 1710.34,152.45 59,206 3224.25,258.77 1947.95,288.51 2437,303 39,327 1872,332 2488,360 1829.98,398.02 529,405 665,409 37,433 2468,450 2229,457 1844.81,474.32 2043,579 44,593 3004.18,605.04 2762,678 2960,689 2382,740 2847,752 44,754 3304,770 2947,780 2714,820 2549,829 2099,844 3304,859.2 1493,888 44,891 1393.75,897.33 1839,902 2022,905 1624,917 2343,937 3304,948.4 2667,953 2789,958 2083,961 2560,968 1574,973 2929,973 3302,1007 1723,1024 2616,1037 38,1063 160,1066 2137,1088 2939,1098 2853,1099 2029,1100 3321,1102 160,1105 1833,1112 2639,1132 250,1168 217,1170 2350,1193 1625,1207 3325,1218 46,1224 1674,1224 2534,1232 2134,1255 41,1348 37,1481 182,1497 292.99,1520.91 221.57,1530.89 448,1545 260,1556 165,1562 33,1591 1110,1705 925,1712 117,1755 881,1780 78,1784 1481,1820 1540,1820 91,1915 1509,1927 1431,1942 1472,1943 188,1952 722,1978 230,1993 106,2019 725,2023 238,2072 90,2130 405,2139 196,2162 486,2164 544,2203 98,2275 902,2374 83,2418 814,2513 707,2561 88,2591 600,2655 728,2655 113,2709 158,2810 281,2856 520,2864 788,2871
  other v3: 836.83,53.24 1085.91,67.08 945.22,93.6 1038.63,132.8 1147.02,153.56 939.46,161.63 554.84,174.37 621.02,182.82 712.53,203.94 1044.39,206.6 1766.4,220.38 1720.76,220.79 1088.21,267.72 1722.81,276.43 1664.13,387.42 1184.18,443.85 1631.48,447.68 960.97,451.47 1370.94,455.4 1056.32,462.24 1133.21,466.85 1405.68,475.85 1334.84,483.44 1585.44,495.85 1046.69,498.69 1372.56,504.1 125.97,505.79 1411.49,513.05 1148.42,519.35 1333.63,529.16 917.15,545.58 413.09,554.4 912.29,608.88 868.31,641.36 318.64,646.73 1050.23,666.24 1162.59,667.24 1341.16,692.32 1243.85,708.37 1309.54,709.45 1150.55,711.38 1289.99,776.59 1190.68,818.72 243,824.51 1128.48,841.8 166.3,853.92 204.21,864.79 164,904.92 661.61,930.26 432.3,931.88 511.74,933.84 1306.98,941.99 972.63,971.95 726.38,972.69 1069.55,974.41 868.31,975.24 1141.01,975.24 1238.1,974.61 798.59,992.05 939.55,1083.97 1024.24,1087.14 1399.58,1123.97 812.87,1126.64 848.87,1241.31 1139.56,1250.65 1311.58,1251.98 1474.26,1270.65 1252.9,1282.65 1551.59,1313.32 1228.9,1341.32 1022.22,1354.66 896.88,1382.66 653.79,1502.23 711.72,1534.78 644.03,1551.7 701.96,1593.35 752.08,1594.66 729.3,1649.33 767.7,1667.55 709.77,1731.99 847.83,2051.23 778.78,2127.81 924.41,2132.83 1265.87,2164.21 717.27,2179.28 1096.39,2180.53 844.06,2215.68 1062.3,2217.47 1172.97,2235.77 659.52,2243.3 611.82,2280.96 780.04,2284.73 947.01,2296.03 1093.88,2329.92 692.16,2366.33 636.93,2414.03 980.9,2439.14
  other v5: 1621.62,638.54 1567.39,731.61 1479.45,808.56 1683,1295 1862.49,1308.21 1908.21,1341.65 1679.6,1368.95 1610,1384 3082.93,1971.22 3494.17,2001.32 3082.93,2007.34 3081.75,2041.68 3496.44,2069.46 2292.84,2074.12 3079.97,2075.44 2287.92,2112.92 3078.16,2112.95 3496.44,2147.82 3490.76,2220.5 3491.9,2287.51 3495.31,2352.24 3502.15,2425.84
  other v6: 2625.89,195.58 2689.78,263.73 2742.6,315.69
GXM: C53.1 U2.65 | length 539.1
  Top Layer w6.07: C53.1@1649,1647.08 1668.08,1628 ccw(c1675.15,1635.08) 1675.15,1625.07 1780.93,1625.07 cw(c1780.93,1514) 1859.46,1592.54 1891.71,1560.29 ccw(c1962.42,1631) 1962.42,1531 2014.55,1531 ccw(c2014.55,1588.45) 2055.17,1547.83 cw(c2096.44,1506.56) 2096.44,1564.92 2118.66,1564.92 cw(c2124.31,1559.27) 2124.31,1567.26 U2.65@2139.82,1567.26
GXP: C5.1 U2.66 | length 539.3
  Top Layer w6.07: C5.1@1649,1591 1668,1610 cw(c1677.66,1600.34) 1677.66,1614 1780.93,1614 cw(c1780.93,1514) 1851.64,1584.71 1883.88,1552.46 ccw(c1962.42,1631) 1962.42,1519.93 2014.55,1519.93 ccw(c2014.55,1588.45) 2063,1540 cw(c2096.44,1506.56) 2096.44,1553.85 2118.66,1553.85 ccw(c2124.31,1559.5) 2124.31,1551.51 U2.66@2139.82,1551.51
HD0: P3.19 U2.15 | length 2192
  Top Layer w6: U2.15@2392.49,1489.22 2392.49,1464.51 2437,1420 2553,1420 v4(2568,1435)
  Mid-Layer 2 w6: P3.19@2562,2933 2613,2882 2613,2714 2784,2543 2784,2034.5 2784,1943.92 2784,1940.92 ccw(c2791.5,1940.92) 2791.5,1933.42 2792.5,1933.42 cw(c2792.5,1925.92) 2792.5,1918.42 2775.5,1918.42 ccw(c2775.5,1910.92) 2775.5,1903.42 2792.5,1903.42 cw(c2792.5,1895.92) 2792.5,1888.42 2775.5,1888.42 ccw(c2775.5,1880.92) 2775.5,1873.42 2792.5,1873.42 cw(c2792.5,1865.92) 2792.5,1858.42 2775.5,1858.42 ccw(c2775.5,1850.92) 2775.5,1843.42 2792.5,1843.42 cw(c2792.5,1835.92) 2792.5,1828.42 2775.5,1828.42 ccw(c2775.5,1820.92) 2775.5,1813.42 2792.5,1813.42 cw(c2792.5,1805.92) 2792.5,1798.42 2775.5,1798.42 ccw(c2775.5,1790.92) 2775.5,1783.42 2787.2,1783.42 cw(c2787.2,1775.92) 2787.2,1768.42 2776.5,1768.42 ccw(c2776.5,1760.92) 2776.5,1753.42 cw(c2776.5,1745.92) 2784,1745.92 2784,1708.07 2784,1651 v4(2568,1435)
HD1: P3.20 U2.17 | length 2192.2
  Top Layer w6: U2.17@2423.98,1489.22 2423.98,1474.02 2429,1469 v4(2528,1469)
  Mid-Layer 2 w6: v4(2528,1469) 2725,1666 2725,1942.57 2725,1945.57 ccw(c2717.5,1945.57) 2717.5,1953.07 2710.34,1953.07 cw(c2710.34,1960.57) 2710.34,1968.07 2729.34,1968.07 ccw(c2729.34,1975.57) 2729.34,1983.07 2710.34,1983.07 cw(c2710.34,1990.57) 2710.34,1998.07 2729.34,1998.07 ccw(c2729.34,2005.57) 2729.34,2013.07 2710.34,2013.07 cw(c2710.34,2020.57) 2710.34,2028.07 2729.34,2028.07 ccw(c2729.34,2035.57) 2729.34,2043.07 2710.34,2043.07 cw(c2710.34,2050.57) 2710.34,2058.07 2729.34,2058.07 ccw(c2729.34,2065.57) 2729.34,2073.07 2710.34,2073.07 cw(c2710.34,2080.57) 2710.34,2088.07 2729.34,2088.07 ccw(c2729.34,2095.57) 2729.34,2103.07 2710.34,2103.07 cw(c2710.34,2110.57) 2710.34,2118.07 2729.34,2118.07 ccw(c2729.34,2125.57) 2729.34,2133.07 2710.34,2133.07 cw(c2710.34,2140.57) 2710.34,2148.07 2729.34,2148.07 ccw(c2729.34,2155.57) 2729.34,2163.07 2710.34,2163.07 cw(c2710.34,2170.57) 2710.34,2178.07 2729.34,2178.07 ccw(c2729.34,2185.57) 2729.34,2193.07 2710.34,2193.07 cw(c2710.34,2200.57) 2710.34,2208.07 2729.34,2208.07 ccw(c2729.34,2215.57) 2729.34,2223.07 2711.27,2223.07 cw(c2711.27,2230.57) 2711.27,2238.07 2725,2238.07 ccw(c2725,2245.57) 2725,2253.07 2717.5,2253.07 cw(c2717.5,2260.57) 2717.5,2268.07 ccw(c2717.5,2275.57) 2725,2275.57 2725,2332.43 2725,2522 2562,2685 P3.20@2562,2833
HD2: P3.21 U2.53 | length 2178
  Top Layer w6: v4(2080,1783) 2106.76,1756.24 U2.53@2139.82,1756.24
  Bottom Layer w6: v4(2080,1783) 2022,1841 1788,1841 1693,1936 1693,2062.04 1693,2065.04 ccw(c1684.5,2065.04) 1684.5,2073.54 1683.5,2073.54 cw(c1683.5,2082.04) 1683.5,2090.54 1694.98,2090.54 ccw(c1694.98,2099.04) 1694.98,2107.54 1684.5,2107.54 cw(c1684.5,2116.04) 1684.5,2124.54 ccw(c1684.5,2133.04) 1693,2133.04 1693,2164.82 1693,2422 1829,2558 2306,2558 2414,2666 2414,2885 P3.21@2462,2933
HD3: P3.22 U2.19 | length 2221.4
  Top Layer w6: U2.19@2456.18,1535.76 2930.76,1535.76 3043,1648 3043,1680 3043,1686.5 3042.35,1686.5 cw(c3042.35,1692.35) 3036.5,1692.35 3036.5,1693.65 cw(c3042.35,1693.65) 3042.35,1699.5 3043,1699.5 3043.65,1699.5 ccw(c3043.65,1705.35) 3049.5,1705.35 3049.5,1706.65 ccw(c3043.65,1706.65) 3043.65,1712.5 3043,1712.5 3042.35,1712.5 cw(c3042.35,1718.35) 3036.5,1718.35 3036.5,1719.65 cw(c3042.35,1719.65) 3042.35,1725.5 3043,1725.5 3043.65,1725.5 ccw(c3043.65,1731.35) 3049.5,1731.35 3049.5,1732.65 ccw(c3043.65,1732.65) 3043.65,1738.5 3043,1738.5 3042.35,1738.5 cw(c3042.35,1744.35) 3036.5,1744.35 3036.5,1745.65 cw(c3042.35,1745.65) 3042.35,1751.5 3043,1751.5 3043.65,1751.5 ccw(c3043.65,1757.35) 3049.5,1757.35 3049.5,1758.65 ccw(c3043.65,1758.65) 3043.65,1764.5 3043,1764.5 3042.35,1764.5 cw(c3042.35,1770.35) 3036.5,1770.35 3036.5,1771.65 cw(c3042.35,1771.65) 3042.35,1777.5 3043,1777.5 3043.65,1777.5 ccw(c3043.65,1783.35) 3049.5,1783.35 3049.5,1784.65 ccw(c3043.65,1784.65) 3043.65,1790.5 3043,1790.5 3042.35,1790.5 cw(c3042.35,1796.35) 3036.5,1796.35 3036.5,1797.65 cw(c3042.35,1797.65) 3042.35,1803.5 3043,1803.5 3043.65,1803.5 ccw(c3043.65,1809.35) 3049.5,1809.35 3049.5,1810.65 ccw(c3043.65,1810.65) 3043.65,1816.5 3043,1816.5 3042.35,1816.5 cw(c3042.35,1822.35) 3036.5,1822.35 3036.5,1823.65 cw(c3042.35,1823.65) 3042.35,1829.5 3043,1829.5 3043.65,1829.5 ccw(c3043.65,1835.35) 3049.5,1835.35 3049.5,1836.65 ccw(c3043.65,1836.65) 3043.65,1842.5 3043,1842.5 3042.35,1842.5 cw(c3042.35,1848.35) 3036.5,1848.35 3036.5,1849.65 cw(c3042.35,1849.65) 3042.35,1855.5 3043,1855.5 3043.65,1855.5 ccw(c3043.65,1861.35) 3049.5,1861.35 3049.5,1862.65 ccw(c3043.65,1862.65) 3043.65,1868.5 3043,1868.5 3042.35,1868.5 cw(c3042.35,1874.35) 3036.5,1874.35 3036.5,1875.65 cw(c3042.35,1875.65) 3042.35,1881.5 3043,1881.5 3043,2159 3043,2325 2598,2770 2525,2770 P3.22@2462,2833
HD4: P3.23 U2.20 | length 2220.9
  Top Layer w6: P3.23@2362,2933 2413,2882 2413,2794 2459,2748 2591,2748 3012,2327 3012,1659 2904.51,1551.51 U2.20@2456.18,1551.51
HD5: P3.24 U2.21 | length 2222.3
  Top Layer w6: P3.24@2362,2833 2362,2782 2414,2730 2580,2730 2981,2329 2981,2270 2981,1902.15 ccw(c2982.65,1902.15) 2982.65,1900.5 cw(c2982.65,1894.65) 2988.5,1894.65 2988.5,1893.35 cw(c2982.65,1893.35) 2982.65,1887.5 2981,1887.5 2979.35,1887.5 ccw(c2979.35,1881.65) 2973.5,1881.65 2973.5,1880.35 ccw(c2979.35,1880.35) 2979.35,1874.5 2981,1874.5 2982.65,1874.5 cw(c2982.65,1868.65) 2988.5,1868.65 2988.5,1867.35 cw(c2982.65,1867.35) 2982.65,1861.5 2981,1861.5 2979.35,1861.5 ccw(c2979.35,1855.65) 2973.5,1855.65 2973.5,1854.35 ccw(c2979.35,1854.35) 2979.35,1848.5 2981,1848.5 2982.65,1848.5 cw(c2982.65,1842.65) 2988.5,1842.65 2988.5,1841.35 cw(c2982.65,1841.35) 2982.65,1835.5 2981,1835.5 2979.35,1835.5 ccw(c2979.35,1829.65) 2973.5,1829.65 2973.5,1828.35 ccw(c2979.35,1828.35) 2979.35,1822.5 2981,1822.5 2982.65,1822.5 cw(c2982.65,1816.65) 2988.5,1816.65 2988.5,1815.35 cw(c2982.65,1815.35) 2982.65,1809.5 2981,1809.5 2979.35,1809.5 ccw(c2979.35,1803.65) 2973.5,1803.65 2973.5,1802.35 ccw(c2979.35,1802.35) 2979.35,1796.5 2981,1796.5 2982.65,1796.5 cw(c2982.65,1790.65) 2988.5,1790.65 2988.5,1789.35 cw(c2982.65,1789.35) 2982.65,1783.5 2981,1783.5 2979.35,1783.5 ccw(c2979.35,1777.65) 2973.5,1777.65 2973.5,1776.35 ccw(c2979.35,1776.35) 2979.35,1770.5 2981,1770.5 2982.65,1770.5 cw(c2982.65,1764.65) 2988.5,1764.65 2988.5,1763.35 cw(c2982.65,1763.35) 2982.65,1757.5 2981,1757.5 2979.35,1757.5 ccw(c2979.35,1751.65) 2973.5,1751.65 2973.5,1750.35 ccw(c2979.35,1750.35) 2979.35,1744.5 2981,1744.5 2982.65,1744.5 cw(c2982.65,1738.65) 2988.5,1738.65 2988.5,1737.35 cw(c2982.65,1737.35) 2982.65,1731.5 2981,1731.5 2979.35,1731.5 ccw(c2979.35,1725.65) 2973.5,1725.65 2973.5,1724.35 ccw(c2979.35,1724.35) 2979.35,1718.5 cw(c2979.35,1716.85) 2981,1716.85 2981,1712 2981,1670 2878.26,1567.26 U2.21@2456.18,1567.26
HD6: P3.25 U2.22 | length 2220.3
  Top Layer w6: P3.25@2262,2933 2310,2885 2310,2762 2360,2712 2571,2712 2949,2334 2949,2146 2949,1763.15 cw(c2947.35,1763.15) 2947.35,1761.5 ccw(c2947.35,1755.65) 2941.5,1755.65 2941.5,1754.35 ccw(c2947.35,1754.35) 2947.35,1748.5 2949,1748.5 2950.65,1748.5 cw(c2950.65,1742.65) 2956.5,1742.65 2956.5,1741.35 cw(c2950.65,1741.35) 2950.65,1735.5 2949,1735.5 2947.35,1735.5 ccw(c2947.35,1729.65) 2941.5,1729.65 2941.5,1728.35 ccw(c2947.35,1728.35) 2947.35,1722.5 cw(c2947.35,1720.85) 2949,1720.85 2949,1716 2949,1684 2848.01,1583.01 U2.22@2456.18,1583.01
HD7: P3.26 U2.23 | length 2220.5
  Top Layer w6: P3.26@2262,2833 2262,2761 2330.5,2692.5 2564.5,2692.5 2915,2342 2915,2214 2915,1992.65 ccw(c2916.15,1992.65) 2916.15,1991.5 cw(c2916.15,1985.65) 2922,1985.65 2922,1984.35 cw(c2916.15,1984.35) 2916.15,1978.5 2915,1978.5 2913.85,1978.5 ccw(c2913.85,1972.65) 2908,1972.65 2908,1971.35 ccw(c2913.85,1971.35) 2913.85,1965.5 2915,1965.5 2916.15,1965.5 cw(c2916.15,1959.65) 2922,1959.65 2922,1958.35 cw(c2916.15,1958.35) 2916.15,1952.5 2915,1952.5 2913.85,1952.5 ccw(c2913.85,1946.65) 2908,1946.65 2908,1945.35 ccw(c2913.85,1945.35) 2913.85,1939.5 2915,1939.5 2916.15,1939.5 cw(c2916.15,1933.65) 2922,1933.65 2922,1932.35 cw(c2916.15,1932.35) 2916.15,1926.5 2915,1926.5 2913.85,1926.5 ccw(c2913.85,1920.65) 2908,1920.65 2908,1919.35 ccw(c2913.85,1919.35) 2913.85,1913.5 2915,1913.5 2916.15,1913.5 cw(c2916.15,1907.65) 2922,1907.65 2922,1906.35 cw(c2916.15,1906.35) 2916.15,1900.5 2915,1900.5 2913.85,1900.5 ccw(c2913.85,1894.65) 2908,1894.65 2908,1893.35 ccw(c2913.85,1893.35) 2913.85,1887.5 2915,1887.5 2916.15,1887.5 cw(c2916.15,1881.65) 2922,1881.65 2922,1880.35 cw(c2916.15,1880.35) 2916.15,1874.5 2915,1874.5 2913.85,1874.5 ccw(c2913.85,1868.65) 2908,1868.65 2908,1867.35 ccw(c2913.85,1867.35) 2913.85,1861.5 2915,1861.5 2916.15,1861.5 cw(c2916.15,1855.65) 2922,1855.65 2922,1854.35 cw(c2916.15,1854.35) 2916.15,1848.5 2915,1848.5 2913.85,1848.5 ccw(c2913.85,1842.65) 2908,1842.65 2908,1841.35 ccw(c2913.85,1841.35) 2913.85,1835.5 2915,1835.5 2916.15,1835.5 cw(c2916.15,1829.65) 2922,1829.65 2922,1828.35 cw(c2916.15,1828.35) 2916.15,1822.5 2915,1822.5 2913.85,1822.5 ccw(c2913.85,1816.65) 2908,1816.65 2908,1815.35 ccw(c2913.85,1815.35) 2913.85,1809.5 2915,1809.5 2916.15,1809.5 cw(c2916.15,1803.65) 2922,1803.65 2922,1802.35 cw(c2916.15,1802.35) 2916.15,1796.5 2915,1796.5 2913.85,1796.5 ccw(c2913.85,1790.65) 2908,1790.65 2908,1789.35 ccw(c2913.85,1789.35) 2913.85,1783.5 2915,1783.5 2916.15,1783.5 cw(c2916.15,1777.65) 2922,1777.65 2922,1776.35 cw(c2916.15,1776.35) 2916.15,1770.5 2915,1770.5 2913.85,1770.5 ccw(c2913.85,1764.65) 2908,1764.65 2908,1763.35 ccw(c2913.85,1763.35) 2913.85,1757.5 2915,1757.5 2916.15,1757.5 cw(c2916.15,1751.65) 2922,1751.65 2922,1750.35 cw(c2916.15,1750.35) 2916.15,1744.5 2915,1744.5 2913.85,1744.5 ccw(c2913.85,1738.65) 2908,1738.65 2908,1737.35 ccw(c2913.85,1737.35) 2913.85,1731.5 cw(c2913.85,1730.35) 2915,1730.35 2915,1725 2915,1699 2814.76,1598.76 U2.23@2456.18,1598.76
HD8: P3.27 U2.24 | length 2222
  Top Layer w6: P3.27@2162,2933 2215,2880 2215,2750 2290,2675 2555,2675 2885,2345 2885,2331 2885,1846.18 ccw(c2886.43,1846.18) 2886.43,1844.75 cw(c2886.43,1838.68) 2892.5,1838.68 2892.5,1837.32 cw(c2886.43,1837.32) 2886.43,1831.25 2885,1831.25 2883.57,1831.25 ccw(c2883.57,1825.18) 2877.5,1825.18 2877.5,1823.82 ccw(c2883.57,1823.82) 2883.57,1817.75 2885,1817.75 2886.43,1817.75 cw(c2886.43,1811.68) 2892.5,1811.68 2892.5,1810.32 cw(c2886.43,1810.32) 2886.43,1804.25 2885,1804.25 2883.57,1804.25 ccw(c2883.57,1798.18) 2877.5,1798.18 2877.5,1796.82 ccw(c2883.57,1796.82) 2883.57,1790.75 2885,1790.75 2886.43,1790.75 cw(c2886.43,1784.68) 2892.5,1784.68 2892.5,1783.32 cw(c2886.43,1783.32) 2886.43,1777.25 2885,1777.25 2883.57,1777.25 ccw(c2883.57,1771.18) 2877.5,1771.18 2877.5,1769.82 ccw(c2883.57,1769.82) 2883.57,1763.75 2885,1763.75 2886.43,1763.75 cw(c2886.43,1757.68) 2892.5,1757.68 2892.5,1756.32 cw(c2886.43,1756.32) 2886.43,1750.25 2885,1750.25 2883.57,1750.25 ccw(c2883.57,1744.18) 2877.5,1744.18 2877.5,1742.82 ccw(c2883.57,1742.82) 2883.57,1736.75 cw(c2883.57,1735.32) 2885,1735.32 2885,1730 2885,1712 2787.5,1614.5 U2.24@2456.18,1614.5